# EAGLE board led-regulator (EAGLE 6.4)
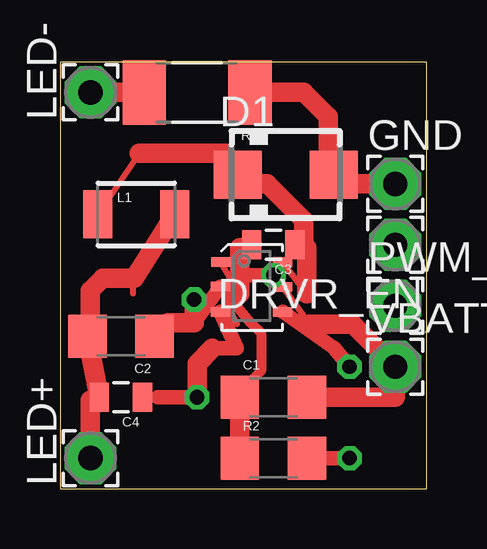
[diagram p0: board, top side]
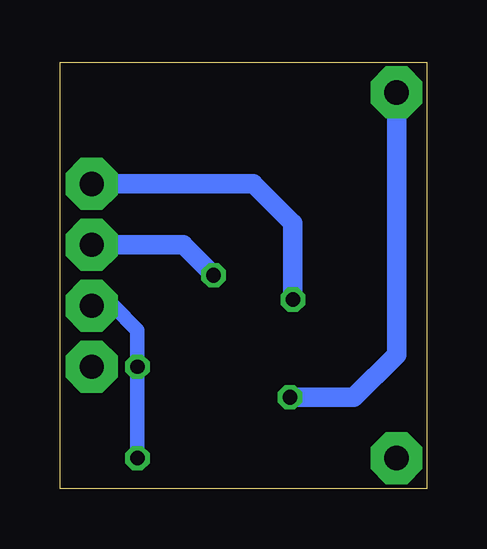
[diagram p1: board, bottom side, seen from below]

Size 15.29 x 17.77 mm. Coordinates in mm from the lower left corner, seen from the top.
Outline: 0,0 15.29,0 15.29,17.77 0,17.77 0,0
Copper layers (1*16): Top 0.035mm / dielectric 1.5mm / Bottom 0.035mm
Design rules "default": minimum track width 10mil, minimum drill 24mil, track to track 8mil, track to pad 8mil, pad to pad 8mil, via to via 8mil, smd to smd 8mil, copper to edge 40mil, drill to drill 8mil, minimum pad ring 10mil, minimum via ring 8mil, stop-mask expansion 4mil, vias tented up to drill 0mil, thermal gap 10mil

## Footprints (pad centres in the part's own frame; a part is rotated, then mirrored left to right if it is on the bottom)
1206 = smd 1.6 x 1.8: 1 -1.4,0; 2 1.4,0
0805 = smd 0.8 x 1.2: 1 -0.9,0; 2 0.9,0
SMA = smd 2 x 2: A 2,0; C -2,0
2,15/1,0 = drill 1.016 pad 2.159 octagon: 1 0,0
1210 = smd 1.2 x 2: 1 -1.6,0; 2 1.6,0
R2010 = smd 1.8 x 2.7: 1 -2.2,0; 2 2.2,0
TSOT-6 = smd 0.406 x 0.813: 1 -1.06,-1.3; 2 -0.04,-1.32; 3 1.02,-1.32; 4 1.02,1.27; 5 -0.02,1.27; 6 -1.05,1.28

## Placement (x,y rotation side)
C1  10uF  [1206]  8.89,3.81 0 top
C2  1uF  [1206]  2.54,6.35 180 top
C3  10nF  [0805]  8.89,10.16 180 top
C4  1uF  [0805]  2.54,3.81 180 top
D1  SS13-E3  [SMA]  9.4,13.08 0 top
DRVR_EN  [2,15/1,0]  13.97,10.16 180 top
GND  [2,15/1,0]  13.97,12.7 0 top
L1  8.2uH  [1210]  3.17,11.43 0 top
LED+  [2,15/1,0]  1.27,1.27 90 top
LED-  [2,15/1,0]  1.27,16.51 90 top
PWM_EN  [2,15/1,0]  13.97,7.62 0 top
R1  0.2  [R2010]  5.71,16.51 180 top
R2  100k  [1206]  8.89,1.27 0 top
U$1  LM3405TSOT-6  [TSOT-6]  8,8.38 270 top
VBATT  [2,15/1,0]  13.97,5.08 0 top

## Library data of the parts
C1-C4 = SparkFun-Capacitors
D1 = diode
DRVR_EN GND LED+ LED- PWM_EN VBATT = wirepad
L1 R1 R2 = SparkFun-Passives
U$1 = Synapseware

## Nets
GND: C1.1 C2.1 D1.A GND.1 R1.1 R2.1 U$1.2
N$1: C3.2 DRVR_EN.1 U$1.1
N$2: C4.1 LED-.1 R1.2 U$1.3
N$3: PWM_EN.1 R2.2 U$1.4
N$4: C3.1 D1.C L1.1 U$1.6
N$5: C2.2 C4.2 L1.2 LED+.1
VBATT: C1.2 U$1.5 VBATT.1

## Tracks (layer width: path | path; a pad name or v marks a point on that pad's centre or on a via)
GND  (via drill 0.61)
  Top 0.254: 7.62,1.27 R2.1 | 4.57,6.86 4.06,6.35 C2.1 | 7.37,6.86 U$1.2 | 7.75,4.32 7.73,4.26 7.62,3.81 C1.1 | 8.38,16.51 R1.1 | 11.18,13.72 11.43,13.46 D1.A 11.18,13.72
  Top 0.406: 7.73,4.26 8.38,4.91 8.38,6.48 7.94,6.92 U$1.2
  Top 0.61: U$1.2 5.59,6.92
  Top 0.813: 8.38,16.51 10.16,16.51 11.18,15.49 11.18,13.72 11.18,12.7 GND.1 | R2.1 C1.1 | C2.1 4.51,6.92 5.59,6.92 v5.59,7.87
  Bottom 0.813: v5.59,7.87 5.59,11.05 7.24,12.7 GND.1
N$1  (via drill 0.61)
  Top 0.254: 7.49,8.13 U$1.1 | 7.62,10.16 C3.2
  Top 0.61: 7.49,8.89 8.76,8.89
  Top 0.813: C3.2 7.49,10.03 7.49,8.89 7.49,8.13 | 8.76,8.89 v8.89,8.89
  Bottom 0.813: v8.89,8.89 10.16,10.16 DRVR_EN.1
N$2  (via drill 0.61)
  Top 0.254: 7.37,5.84 U$1.3 | 4.06,3.81 C4.1
  Top 0.61: 4.06,3.81 v5.71,3.81 | 6.35,5.84 7.36,5.84 U$1.3
  Top 0.813: LED-.1 R1.2 | v5.71,3.81 5.71,5.21 6.35,5.84
  Bottom 0.813: LED-.1 1.27,5.59 3.05,3.81 v5.71,3.81
N$3  (via drill 0.6)
  Top 0.61: U$1.4 11.41,5.86 v12.06,5.08 | v12.06,1.27 R2.2
  Bottom 0.61: PWM_EN.1 13.08,7.62 12.06,6.6 v12.06,5.08 v12.06,1.27
N$4
  Top 0.254: 10.29,8.13 U$1.6 | 10.41,10.16 C3.1 10.16,10.16 | 7.62,12.7 7.62,13.21 D1.C 7.37,13.46 7.11,13.72 | 3.3,13.97 L1.1
  Top 0.813: 3.3,13.97 6.86,13.97 7.11,13.72 | 7.62,12.7 8.64,12.7 10.16,11.18 10.16,10.29 C3.1 10.29,10.04 10.29,8.13
N$5
  Top 0.254: 3.05,8.13 3.05,8.64 L1.2 | 1.27,6.35 C2.2 | 1.27,3.81 C4.2
  Top 0.813: LED+.1 1.27,3.68 C4.2 C2.2 | 1.27,6.35 1.27,8.26 1.78,8.76 3.09,8.76 L1.2
VBATT
  Top 0.254: 10.41,6.86 U$1.5 | 10.41,3.81 C1.2
  Top 0.813: C1.2 13.97,3.81 VBATT.1 12.19,6.86 10.41,6.86